# Altium PCB CH32V205V-R0.PcbDoc (part 1 of 2)
Units mil, origin at the board's own origin, x right, y up, seen from the top; angles counter-clockwise.
Board outline 3895.03 x 3750.03 mil, 2 copper layers (Top Layer, Bottom Layer); 66 components, 111 nets, 402 pads, 717 vias.
Unrouted connection lines stored in the file: 82.
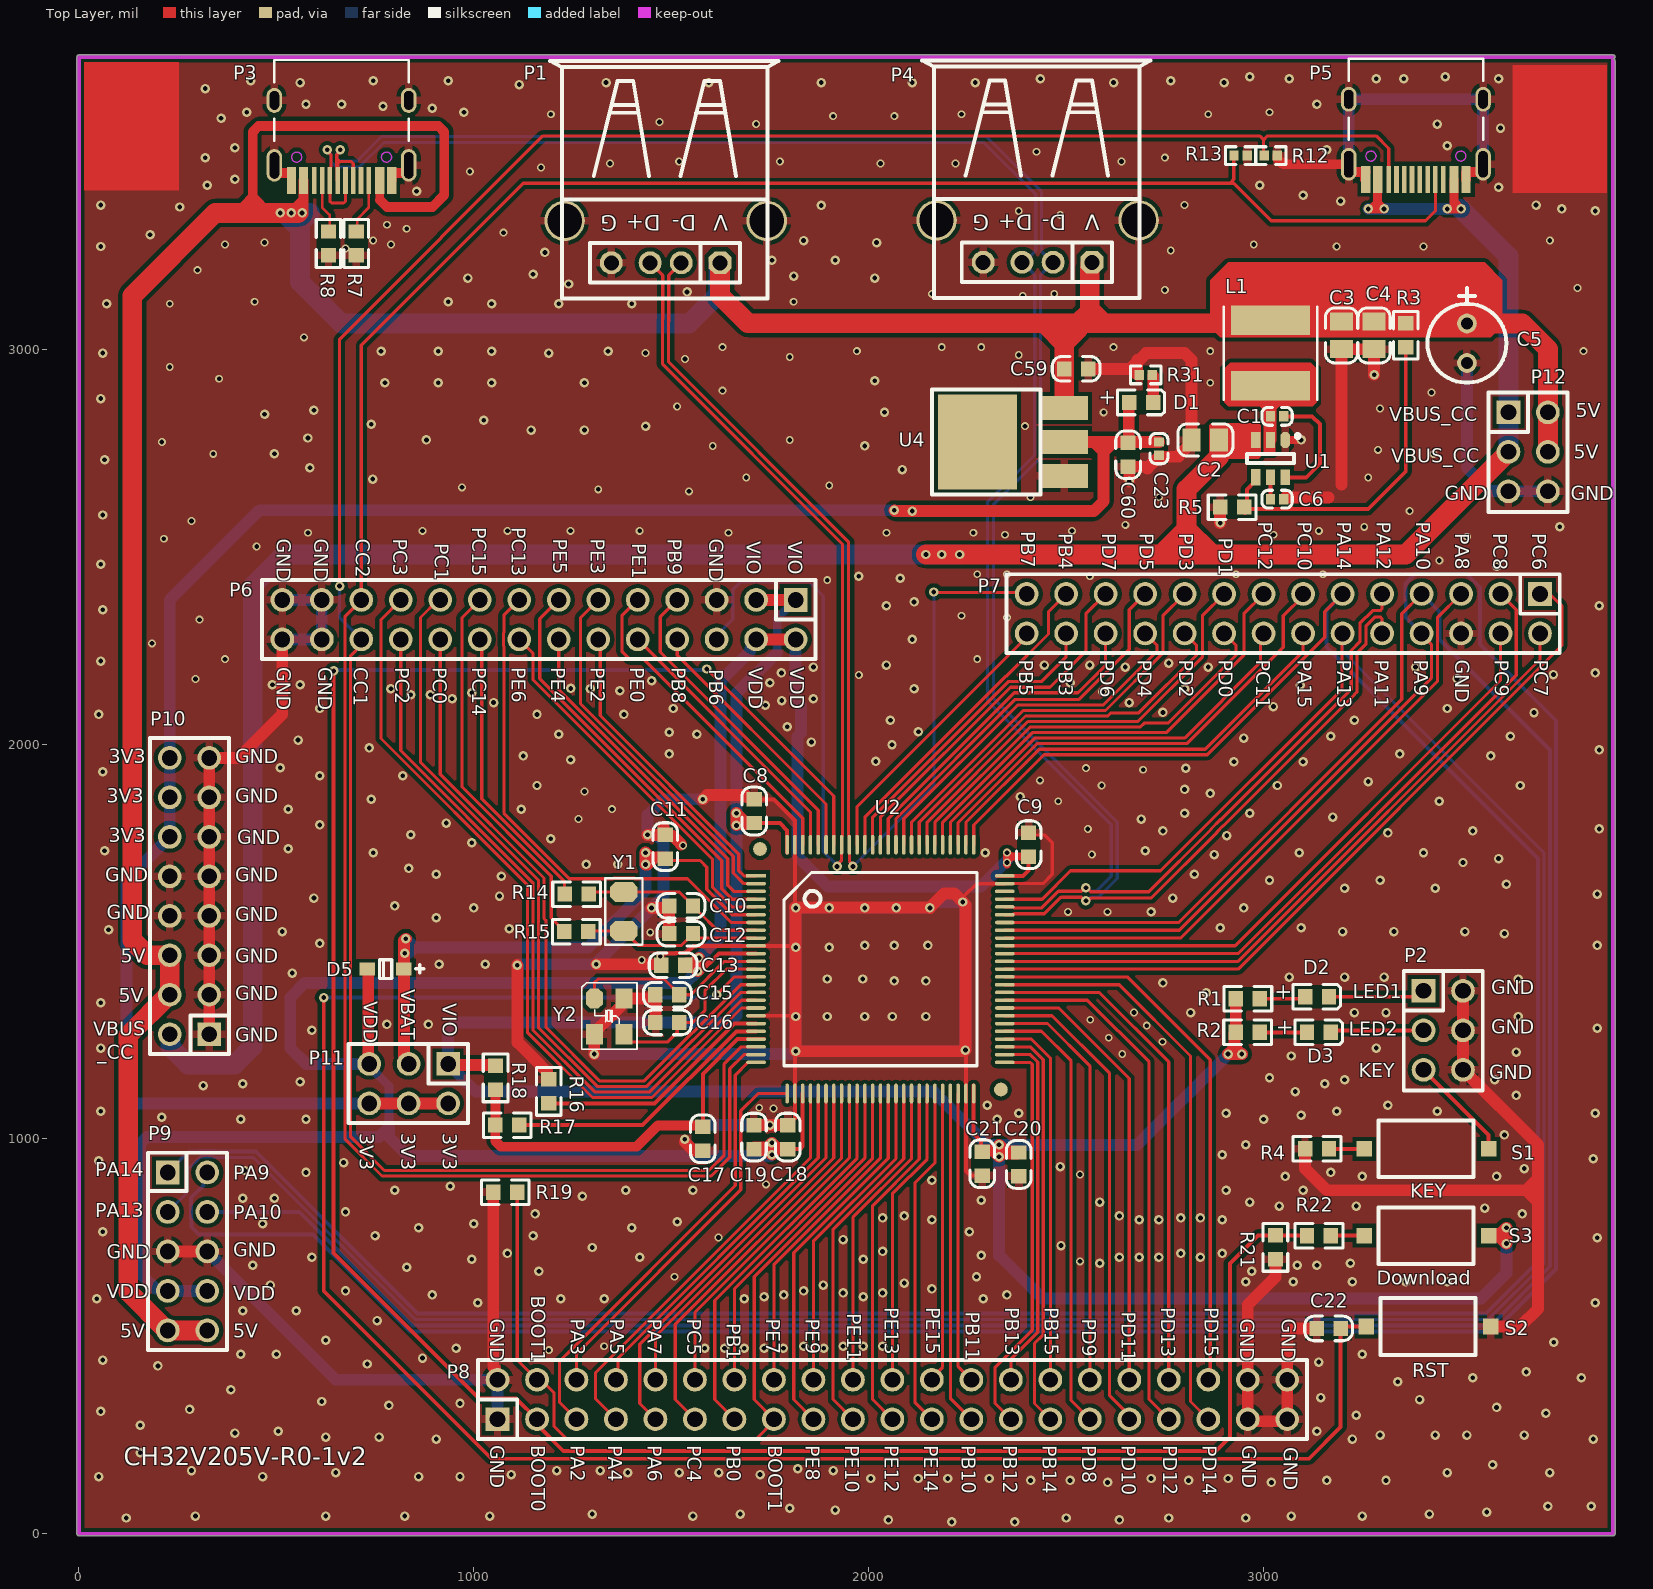
[diagram p0: Top Layer view]
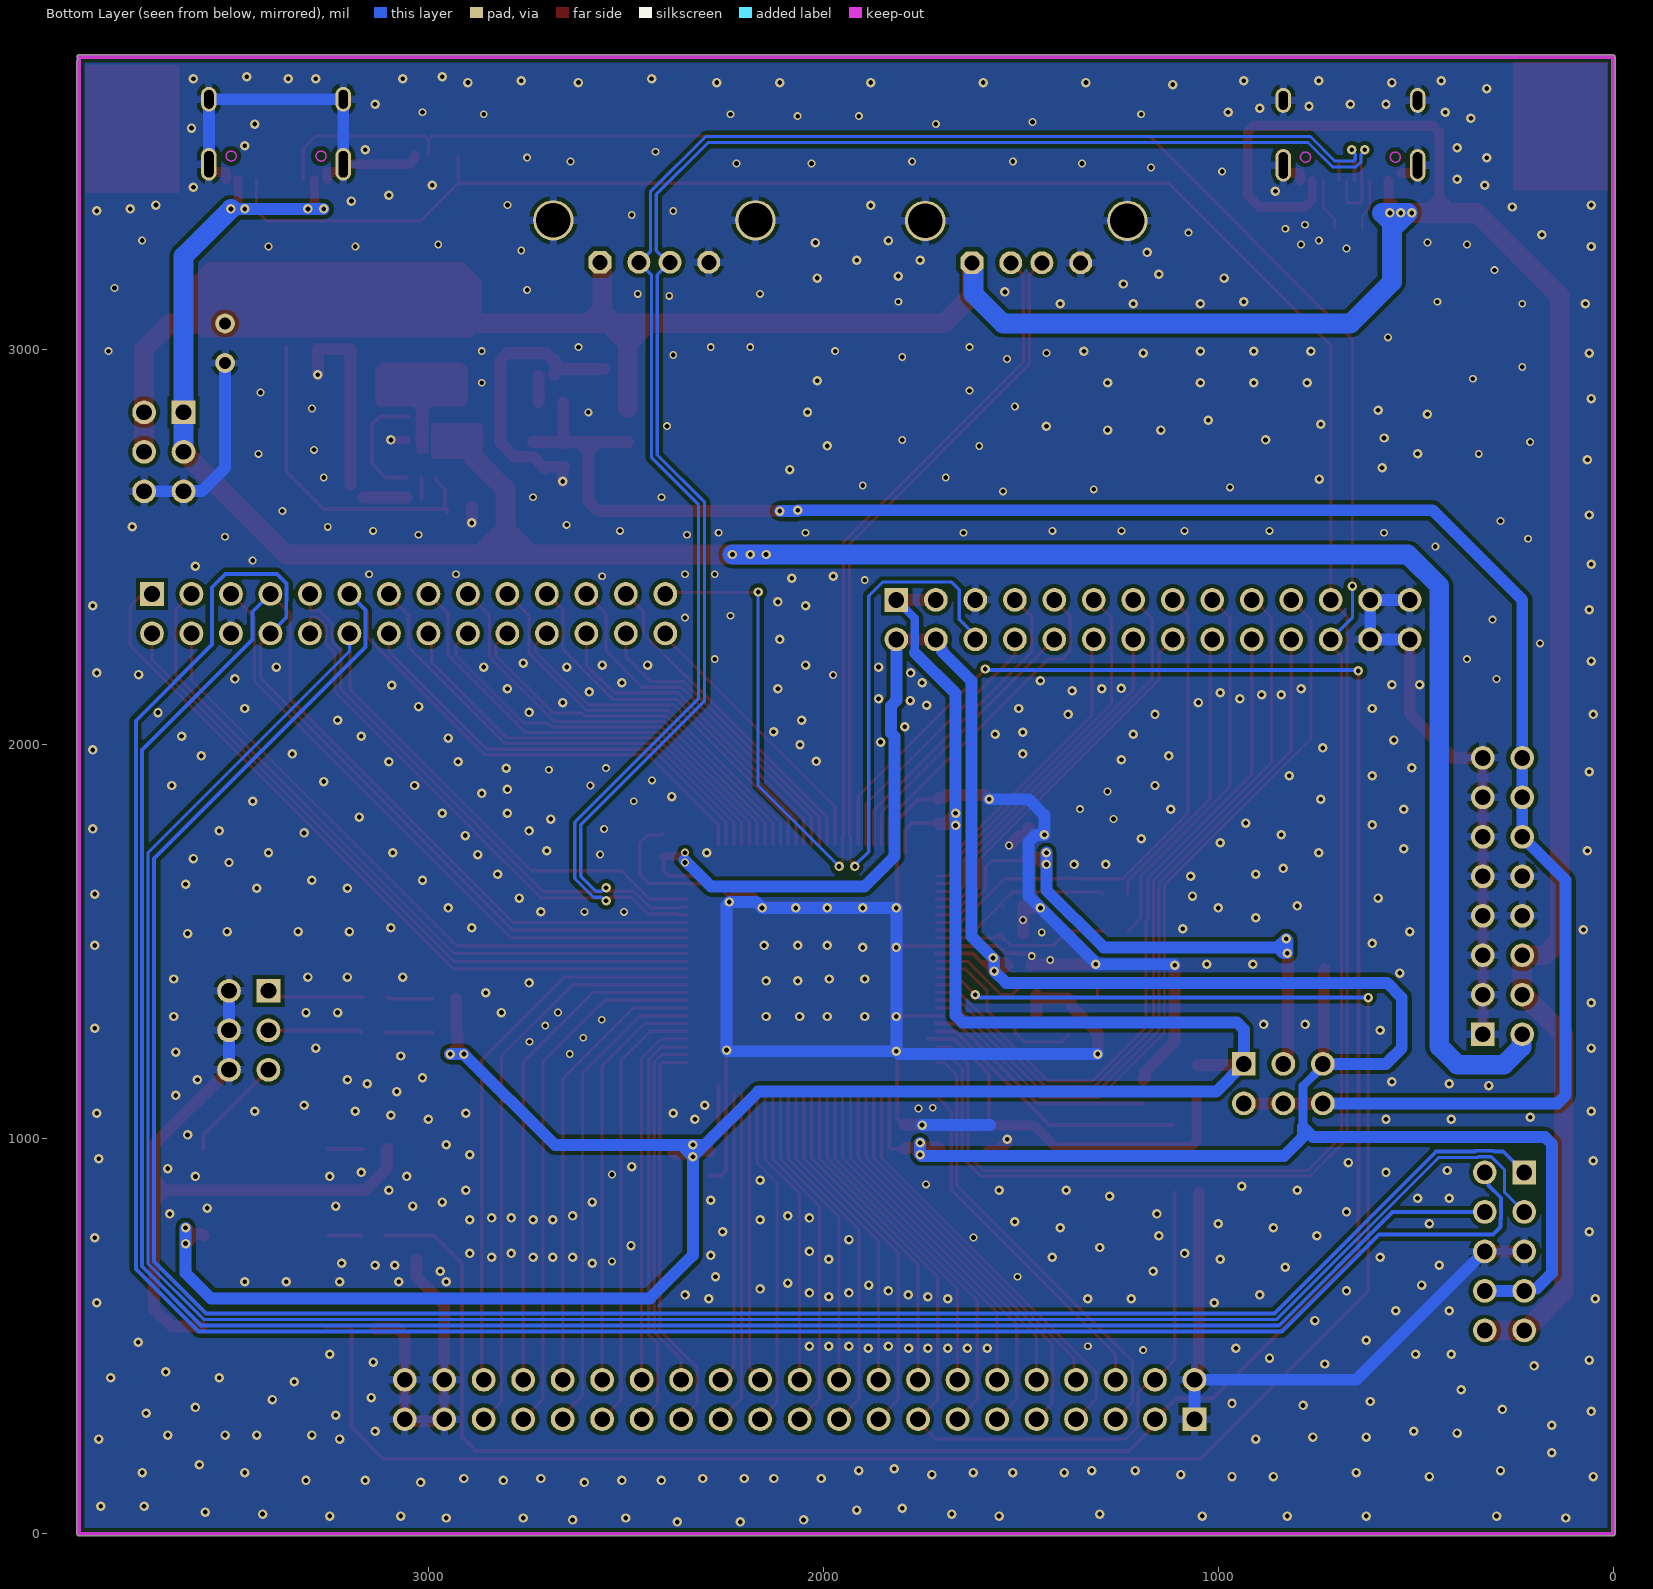
[diagram p1: Bottom Layer view, seen from below]

## Layer stack, top to bottom
Top Solder: solder mask 0.4, Solder Resist, Dk 3.5
Top Layer: signal copper 1.4
Dielectric 1: dielectric 12.6, FR-4, Dk 4.8
Bottom Layer: signal copper 1.4
Bottom Solder: solder mask 0.4, Solder Resist, Dk 3.5

## Board outline
-5.02,0 ccw(c0,0) 0,-5.02 3885,-5.02 ccw(c3885,0) 3890.02,0 3890.02,3730 ccw(c3885,3730) 3885.39,3735 ccw(c3885,3740) 3890.02,3740 ccw(c3885,3740) 3885,3745.02 0,3745.02 ccw(c0,3740) -5.02,3740

## Design rules (kind name [scope] priority, off if disabled: settings)
Clearance Clearance_1 [InPolygon] p1: gap=10 ignorepadtopadclearanceinfootprint=FALSE
Clearance [All] p2: gap=6 ignorepadtopadclearanceinfootprint=FALSE except(8: Arc-Via Track-Via SMDPad-Via THPad-Via Via-Via Via-Fill Via-Poly Via-Region Via-Hole)
ComponentClearance [All] p1 off: gap=10 collisioncheckmode=3 verticalgap=10 showdistances=FALSE
DiffPairsRouting [All] p1: maxlimit=10 minlimit=7 mostfreqgap=8 toplayer_minwidth=6 toplayer_maxwidth=15 toplayer_prefwidth=8 bottomlayer_minwidth=6 bottomlayer_maxwidth=15 bottomlayer_prefwidth=8 maxuncoupledlength=500
MinimumSolderMaskSliver [All] p1 off: minsoldermaskwidth=10
PolygonConnect PolygonConnect_1 [IsVia] p1: connectstyle=Direct reliefconductorwidth=10 reliefentries=4 polygonreliefangle="90 Angle" airgapwidth=10
PolygonConnect [All] p2: connectstyle=Relief reliefconductorwidth=20 reliefentries=4 polygonreliefangle="90 Angle" airgapwidth=10
RoutingVias [All] p1: holewidth=16 width=28 viastyle="Through Hole" minholewidth=11.81 minwidth=19.68 maxholewidth=28 maxwidth=50
SilkToSilkClearance [All] p1 off: silktosilkclearance=10
SilkToSolderMaskClearance [IsPad] p1 off: minsilkscreentomaskgap=10 clearancetoexposedcopper=TRUE
SolderMaskExpansion [All] p1: expansion=2 istentingtop=FALSE
Width [All] p1: maxlimit=100 minlimit=5 preferedwidth=10
25 further rules are at their usual default settings.

## Classes and differential pairs
differential pair NewDifferentialPair1: +PB7 -PB6
differential pair A: +PA12 -PA11

## Components (designator, comment, footprint, x,y, rotation, side; value= is the part's Value field where it differs from the comment)
C1 "NC(100nF)" 0402_C 3017.5,2830 r90 top
C2 "NC(22uF)" 0805_C 2817.5,2770 r0 top
C3 "NC(22uF)" 0805_C 3197.5,2999.92 r90 top
C4 "NC(22uF)" 0805_C 3280,3000 r90 top
C5 "NC(220uF)" CD0.1 3515,3065 r270 top
C6 "NC(1uF)" 0402_C 3050.96,2620 r270 top
C8 "0.1uF" 0603_C 1710,1860.63 r270 top
C9 "0.1uF" 0603_C 2405,1715 r90 top
C10 "12pF" 0603_C 1494.37,1590 r0 top
C11 "0.1uF" 0603_C 1485,1770.63 r270 top
C12 "12pF" 0603_C 1494.37,1520 r0 top
C13 "0.1uF" 0603_C 1535,1440 r180 top
C15 "22pF" 0603_C 1460,1365 r0 top
C16 "22pF" 0603_C 1460,1295 r0 top
C17 "0.1uF" 0603_C 1580,1030.63 r270 top
C18 "0.1uF" 0603_C 1795,1035 r270 top
C19 "4.7uF" 0603_C 1709.52,974.37 r90 top
C20 "4.7uF" 0603_C 2380,965.63 r270 top
C21 "0.1uF" 0603_C 2287.71,967.71 r270 top
C22 "0.1uF" 0603_C 3134.37,520 r0 top
C23 "0.1uF" 0402_C 2735,2765 r0 top
C59 "10uF" 0603_C 2495,2950 r0 top
C60 "10uF" 0603_C 2656.83,2762.81 r270 top
D1 "RED" 0603+ 2660,2865 r0 top
D2 "BLUE" 0603+ 3105,1360 r0 top
D3 "RED" 0603+ 3110,1270 r0 top
D5 "B0520WS" SOD-323 822.91,1430 r180 top
L1 "NC(15uH)" SMD_6x6mm 3017.5,2990 r90 top
P1 "USBHS" USBAF 1623.7,3218.7 r180 top locked
P2 "IO" IDC6-2.54mm 3405,1375 r270 top
P3 "USBFS" TYPE-C-Receptacle-2.0 665.08,3427.24 r180 top locked
P4 "USBFS" USBAF 2565.59,3220 r180 top locked
P5 "USBPD" TYPE-C-Receptacle-2.0 3385.79,3430 r180 top locked
P6 "" IDC28-2.54MM 1815,2365 r270 top
P7 "" IDC28-2.54MM 3700,2380 r270 top
P8 "HEADER 21x2" IDC42-2.54MM 1060,290 r90 top locked
P9 "LINK" IDC10-2.54mm 225,515 r0 top
P10 "HEADER 8x2" IDC16-2.54mm 330,1265 r180 top
P11 "HEADER 3x2" IDC6-2.54mm 935,1190 r180 top
P12 "HEADER 3x2" IDC6-2.54mm 3620,2840 r270 top
R1 "1K" 0603 2930,1355 r0 top
R2 "1K" 0603 2929.37,1270 r0 top
R3 "NC(100k)" 0603 3360,3005 r90 top
R4 "10K" 0603 3105,975 r0 top
R5 "NC(20k)" 0603 2890,2600 r0 top
R7 "NC(5.1K)" 0603 702,3298 r270 top
R8 "NC(5.1K)" 0603 632,3298 r270 top
R12 "NC(5.1K)" 0402 3001.54,3490 r0 top
R13 "NC(5.1K)" 0402 2925,3490 r0 top
R14 "NC(0R)" 0603 1230,1620 r0 top
R15 "NC(0R)" 0603 1229.37,1525 r0 top
R16 "0R" 0603 1190,1150.63 r270 top
R17 "0R" 0603 1054.37,1035 r0 top
R18 "0R" 0603 1055,1185 r270 top
R19 "10K" 0603 1110,865 r180 top
R21 "10K" 0603 3030,755.63 r270 top
R22 "1K" 0603 3110,755 r0 top
R31 "1K" 0402 2685,2935 r0 top
S1 "KEY" SMD_6.1x3.65x2.5mm-KEY 3569.96,975 r180 top
S2 "RST#" SMD_6.1x3.65x2.5mm-KEY 3574.96,525 r180 top
S3 "Download" SMD_6.1x3.65x2.5mm-KEY 3569.96,755 r180 top
U1 "NC(DC-DC:20V to 5V)" SOT-23-6 3054.9,2770 r180 top
U2 "CH32V205V" LQFP100 1714.72,1666.18 r270 top locked
U4 "1117-3.3V" SOT-223 2495,2679 r90 top
Y1 "32768Hz" FC-135 1380,1625 r270 top
Y2 "8MHz" XT3225 1305.2,1355.55 r270 top

## Footprints (in the part's own frame and the unit in brackets; to place one, negate y for a bottom-side part, rotate by r counter-clockwise, add the part's x,y. Pads: shape width x height; smd on the part's side, far side on the other; paste and mask are expansions set on the pad)
0402 [mm]
  rect 0.6x0.65 smd mask+0.051: 1(0,0) 2(0.85,0)
  silkscreen extent -0.55,-0.58 1.4,0.57
0402_C [mm]
  rect 0.65x0.6 smd mask+0.051: 1(0,0) 2(0,-0.85)
  silkscreen extent -0.58,-1.4 0.57,0.55
0603 [mm]
  rect 0.93x0.98 smd: 1(0,0) 2(1.54,0)
  silkscreen extent -0.76,-0.79 2.3,0.79
0603+ [mm]
  rect 0.93x0.98 smd: 1(0,0) 2(1.54,0)
  silkscreen extent -0.76,-0.79 2.27,0.79
0603_C [mm]
  rect 0.93x0.98 smd mask+0.051: 1(0,0) 2(1.54,0)
  silkscreen extent -0.76,-0.79 2.31,0.79
0805_C [mm]
  rect 1.16x1.47 smd mask+0.051: 1(0,0) 2(1.78,0)
  silkscreen extent -0.88,-1.04 2.66,1.03
CD0.1 [mil]
  round 50 hole 30: 1(0,0) 2(100,0)
  silkscreen extent -90,-100 150,100
FC-135 [mil]
  oct 50x70 smd: 1(0,0) 2(98.43,0)
  silkscreen extent -35,-47 133,47
IDC6-2.54mm [mil]
  rect 60x60 hole 40: 1(0,0)
  round 60 hole 40: 2(0,100) 3(100,0) 4(100,100) 5(200,0) 6(200,100)
  silkscreen extent -50,-50 252,150
IDC10-2.54mm [mil]
  rect 60x60 hole 40: 1(0,400)
  round 60 hole 40: 2(100,400) 3(0,300) 4(100,300) 5(0,200) 6(100,200) 7(0,100) 8(100,100) 9(0,0) 10(100,0)
  silkscreen extent -50,-50 150,450
IDC16-2.54mm [mil]
  rect 60x60 hole 40: 1(0,0)
  round 60 hole 40: 2(100,0) 3(0,-100) 4(100,-100) 5(0,-200) 6(100,-200) 7(0,-300) 8(100,-300) 9(0,-400) 10(100,-400) 11(0,-500) 12(100,-500) 13(0,-600) 14(100,-600) 15(0,-700) 16(100,-700)
  silkscreen extent -50,-750 150,50
IDC28-2.54MM [mil]
  rect 60x60 hole 40: 1(0,0)
  round 60 hole 40: 2(100,0) 3(0,-100) 4(100,-100) 5(0,-200) 6(100,-200) 7(0,-300) 8(100,-300) 9(0,-400) 10(100,-400) 11(0,-500) 12(100,-500) 13(0,-600) 14(100,-600) 15(0,-700) 16(100,-700) 17(0,-800) 18(100,-800) 19(0,-900) 20(100,-900) 21(0,-1000) 22(100,-1000) 23(0,-1100) 24(100,-1100) 25(0,-1200) 26(100,-1200) 27(0,-1300) 28(100,-1300)
  silkscreen extent -50,-1351 150,50
IDC42-2.54MM [mil]
  rect 60x60 hole 40: 1(0,0)
  round 60 hole 40: 2(100,0) 3(0,-100) 4(100,-100) 5(0,-200) 6(100,-200) 7(0,-300) 8(100,-300) 9(0,-400) 10(100,-400) 11(0,-500) 12(100,-500) 13(0,-600) 14(100,-600) 15(0,-700) 16(100,-700) 17(0,-800) 18(100,-800) 19(0,-900) 20(100,-900) 21(0,-1000) 22(100,-1000) 23(0,-1100) 24(100,-1100) 25(0,-1200) 26(100,-1200) 27(0,-1300) 28(100,-1300) 29(0,-1400) 30(100,-1400) 31(0,-1500) 32(100,-1500) 33(0,-1600) 34(100,-1600) 35(0,-1700) 36(100,-1700) 37(0,-1800) 38(100,-1800) 39(0,-1900) 40(100,-1900) 41(0,-2000) 42(100,-2000)
  silkscreen extent -50,-2050 150,50
LQFP100 [mil]
  round 35 smd: 0(-68,10) 0(541.18,620)
  rect 9x50 smd mask+2: 1(0,0)
  oval 9x50 smd mask+2: 2(19.68,0) 3(39.37,0) 4(59.05,0) 5(78.74,0) 6(98.42,0) 7(118.11,0) 8(137.79,0) 9(157.48,0) 10(177.16,0) 11(196.85,0) 12(216.53,0) 13(236.22,0) 14(255.9,0) 15(275.59,0) 16(295.27,0) 17(314.96,0) 18(334.64,0) 19(354.33,0) 20(374.01,0) 21(393.7,0) 22(413.38,0) 23(433.07,0) 24(452.75,0) 25(472.44,0) 51(472.44,629.92) 52(452.75,629.92) 53(433.07,629.92) 54(413.38,629.92) 55(393.7,629.92) 56(374.01,629.92) 57(354.33,629.92) 58(334.64,629.92) 59(314.96,629.92) 60(295.27,629.92) 61(275.59,629.92) 62(255.9,629.92) 63(236.22,629.92) 64(216.53,629.92) 65(196.85,629.92) 66(177.16,629.92) 67(157.48,629.92) 68(137.79,629.92) 69(118.11,629.92) 70(98.42,629.92) 71(78.74,629.92) 72(59.05,629.92) 73(39.37,629.92) 74(19.68,629.92) 75(0,629.92)
  oval 50x9 smd mask+2: 26(551.18,78.74) 27(551.18,98.43) 28(551.18,118.11) 29(551.18,137.8) 30(551.18,157.48) 31(551.18,177.17) 32(551.18,196.85) 33(551.18,216.54) 34(551.18,236.22) 35(551.18,255.91) 36(551.18,275.59) 37(551.18,295.28) 38(551.18,314.96) 39(551.18,334.65) 40(551.18,354.33) 41(551.18,374.02) 42(551.18,393.7) 43(551.18,413.39) 44(551.18,433.07) 45(551.18,452.76) 46(551.18,472.44) 47(551.18,492.13) 48(551.18,511.81) 49(551.18,531.5) 50(551.18,551.18) 76(-78.74,551.18) 77(-78.74,531.5) 78(-78.74,511.81) 79(-78.74,492.13) 80(-78.74,472.44) 81(-78.74,452.76) 82(-78.74,433.07) 83(-78.74,413.39) 84(-78.74,393.7) 85(-78.74,374.02) 86(-78.74,354.33) 87(-78.74,334.65) 88(-78.74,314.96) 89(-78.74,295.28) 90(-78.74,275.59) 91(-78.74,255.91) 92(-78.74,236.22) 93(-78.74,216.54) 94(-78.74,196.85) 95(-78.74,177.17) 96(-78.74,157.48) 97(-78.74,137.8) 98(-78.74,118.11) 99(-78.74,98.43) 100(-78.74,78.74)
  silkscreen extent -8,70 481,560
SMD_6.1x3.65x2.5mm-KEY [mm]
  rect 1x1 smd: 1(0,0) 2(8,0)
  silkscreen extent 0.98,-1.83 7.08,1.83
SMD_6x6mm [mm]
  rect 1.9x5.1 smd: 1(-2.1,0) 2(2.1,0)
  silkscreen extent -3,-3 3,3
SOD-323 [mm]
  rect 1x0.83 smd: 1(0,0) 2(2.36,0)
  silkscreen extent -1.28,-0.6 1.58,0.6
SOT-23-6 [mm] "SOT-23-6"
  oct 0.6x1 smd: 1(0,0)
  rect 0.6x1 smd: 2(0.95,0) 3(1.9,0) 5(0.95,2.4) 6(0,2.4)
  rect 0.6x1.04 smd: 4(1.9,2.4)
  silkscreen extent -0.93,-0.38 2.45,1.49
SOT-223 [mil]
  rect 60x120 smd: 1(0,0) 2(86,0) 3(172,0)
  rect 240x200 smd: ""(86,220)
  silkscreen extent -47,60 219,335
TYPE-C-Receptacle-2.0 [mm]
  oval 1x2.1 hole 0.6 slot 1.7 at 90 deg: 0(-4.32,-0.97) 0(4.32,-0.97)
  oval 1x1.6 hole 0.6 slot 1.2 at 90 deg: 0(-4.32,-5.15) 0(4.32,-5.15)
  rect 0.6x1.75 smd mask+0.051: A1(-3.225,0) A4(-2.45,0) B1(3.225,0) B4(2.45,0)
  rect 0.3x1.75 smd mask+0.051: A5(-1.25,0) A6(-0.25,0) A7(0.25,0) A8(1.25,0) B5(1.75,0) B6(0.75,0) B7(-0.75,0) B8(-1.75,0)
  Keep-Out Layer circle w0.1: c2.89,-1.5 r0.325
  Keep-Out Layer circle w0.1: c-2.89,-1.5 r0.325
  silkscreen extent -4.32,-7.75 4.32,-2.55
USBAF [mm]
  round 2.6 hole 2.2: 0(-3,-2.7) 0(10,-2.7)
  oct 1.473x1.473 hole 0.965: 1(0,0)
  round 1.473 hole 0.965: 2(2.5,0) 3(4.5,0) 4(7,0)
  silkscreen extent -3.75,-12.99 10.95,2.29
XT3225 [mm]
  oct 1.3x1.1 smd: 1(0,0)
  rect 1.3x1.1 smd: 2(2.3,0) 3(2.3,1.9) 4(0,1.9)
  silkscreen extent -1.02,-0.8 3.27,2.74

## Part data
C1 C2 C3 C4 C6: library part "0603 100nF (104) 10% 50V", "贴片电容", Package=0603, SuppliersPartNumber=C14663, ComponentLink1Description=供应商链接, ComponentLink1URL=http://www.szlcsc.com/product/details_15331.html, Supplier=LC
C5 C8 C9 C10 C11 C12 C13 C15 C16 C17 C18 C19 C20 C21 C22 C23 C59 C60: library part CAP, "Capacitor"
D1 D2 D3: library part LED0, "Typical INFRARED GaAs LED", LatestRevisionDate=08-Jul-2005, LatestRevisionNote="Mech Layer 1 removed.", PackageDescription="LED; 2 Leads", PackageReference=LED-0, Published=8-Jun-2000, Publisher="Altium Limited"
D5: library part DIODE, "Diode"
L1: library part INDUCTOR
P1 P4: library part USB, "USB Port"
P2: library part "HEADER 3x2", "Header, 3-Pin, Dual row"
P3 P5: library part TYPE-C1
P6 P7: library part "HEADER 14x2", "Header, 14-Pin, Dual row"
P8: "Header, 21-Pin, Dual row"
P9: library part "HEADER 5x2", "Header, 5-Pin, Dual row"
P10: "Header, 8-Pin, Dual row"
P11 P12: "Header, 3-Pin, Dual row"
R1 R2 R3 R4 R5 R14 R15 R31: library part RES
R7 R8 R12 R13 R19 R21 R22: library part Res2, "Resistor"
  R19 R21 R22: LatestRevisionDate=17-Jul-2002, LatestRevisionNote="Re-released for DXP Platform.", PackageReference=AXIAL-0.4, Published=8-Jun-2000, Publisher="Altium Limited"
R16 R17 R18: library part R
S1 S2 S3: library part KEY1
U1: library part TPS54202, "DCDC"
U2: "RISC-V MCU, 192MHz, USB_480M, USB FS, PD, PIOC, ADC, TKEY, 2*OPA, 2*CMP"
Y1 Y2: library part XTAL, "Crystal Oscillator", LatestRevisionDate=17-Jul-2002, LatestRevisionNote="Re-released for DXP Platform.", PackageDescription="Crystal, Thru-Hole; 2 Leads; Body 3.1 x 8.2 mm (Dia.xH)", PackageReference=R38, Published=8-Jun-2000, Publisher="Altium Limited"

## Via types
v1: diameter 24, hole 12, Top Layer to Bottom Layer, tented both sides, 571 vias
v2: diameter 20, hole 12, Top Layer to Bottom Layer, tented both sides, 134 vias
v3: diameter 19.68, hole 11.81, Top Layer to Bottom Layer, tented both sides, 12 vias

## Nets (pads, with @x,y where several pads share a name; then routed paths per layer and width w, separated by ;. In a path a pad name is that pad's centre, name@x,y a point inside that pad or via, vN(x,y) a via of type N, cw(c..) or ccw(c..) an arc to the next point about the centre after c; other vN are vias at no path point)
3V3: C23.1 C60.1 D1.1 P10.12 P10.14 P10.16 P11.2 P11.4 P11.6 U4.2 | length 5205.9
  Top Layer w30: P11.6@735,1090 P11.4@835,1090 P11.2@935,1090 ; v1(2065,2592) 2067,2590 v1(2110,2590) 2570,2590 2595,2615 2595,2740 ; U4.2@2495,2765 2570,2765 ; C60.1@2659.02,2760.63 C60.1@2656.83,2762.81 ; D1.1@2660,2865 2658.42,2863.41 C60.1@2658.42,2764.4 ; C23.1@2735,2765 2659.02,2765 C60.1@2658.42,2764.4 ; 2570,2765 2595,2765 ; 2570,2765 2595,2740 ; 2595,2740 2620,2765 ; 2595,2740 2595,2765 ; 2595,2765 2620,2765 ; 2620,2765 2654.65,2765 C60.1@2656.83,2762.81 ; C60.1@2656.83,2762.81 C60.1@2658.42,2764.4
  Bottom Layer w30: P11.6@735,1090 140,1090 120,1110 120,1655 P10.12@230,1765 P10.14@230,1865 P10.16@230,1965 230,2365 457,2592 v1(2065,2592) ; v1@2065,2590 v1(2110,2590)
5V: C3.2 C4.2 C5.1 C59.1 L1.2 P1.1 P3.A4 P3.B4 P4.1 P9.9 P9.10 P10.4 P10.6 P12.2 P12.4 R3.2 U4.3 | length 9301.3
  Top Layer w22: P3.A4@761.54,3427.24 761.54,3378.46 762.22,3377.78
  Top Layer w25: 400,3345 400.21,3345 ; 417.6,3362.4 440,3384.79 ; 435,3345 440,3350 440,3384.79 ; 480,3345 479.79,3345 440,3384.79 ; 525,3345 v1@535,3345 ; 551.81,3361.81 565,3375 568.62,3375 ; v1@568.62,3341.67 568.62,3375 ; P3.B4@568.62,3427.24 568.62,3375 ; 762.22,3377.78 780,3360 895,3360 925,3390 925,3550.35 910.36,3565 454.64,3565 440,3550.35 440,3384.79
  Top Layer w50: P9.10@325,515 P9.9@225,515 222.29,515 125,612.29 125,1262.71 230,1367.71 P10.6@230,1465 173,1465 135,1503 135,3135 345,3345 400,3345 ; 400.21,3345 435,3345 479.79,3345 ; 480,3345 525,3345 ; v1@530,3345 v1@555,3345 ; P1.1@1623.7,3218.7 1623.7,3136.3 1694.47,3065.53 2450,3065.53 ; U4.3@2495,2851 C59.1@2495,2950 2495,3015 ; P4.1@2565.59,3220 2561.59,3216 2561.59,3207.86 2560,3206.26 2560,3094.82 ; P12.4@3720,2740 P12.2@3720,2840 3720,3000 3655,3065 C5.1@3515,3065 3507.32,3072.68 L1.2@3017.5,3072.68 3010.36,3065.53 2595,3065.53 ; 2450,3065.53 2505,3065.53 ; 2450,3065.53 2450,3060 2495,3015 ; 2495,3015 2530.71,3050.71 2530.71,3065.53 ; 2495,3015 2495,3055.53 2505,3065.53 ; 2505,3065.53 2530.71,3065.53 ; 2530.71,3065.53 2595,3065.53 ; 2530.71,3065.53 2560,3094.82 ; 2560,3094.82 2565.71,3094.82 2595,3065.53
  Bottom Layer w50: 555,3310 520,3345 585,3345 555,3315 ; v1@560,3345 560,3170 665,3065 1545,3065 1619.7,3139.7 1619.7,3214.7 P1.1@1623.7,3218.7
  other v1: 510,3345 537.5,3345 565,3345
BOOT0: P8.3 R21.1 R22.1 U2.94 | length 6163.8
  Top Layer w8: v1(1590,2190) 1911.57,1868.43 U2.94@1911.57,1744.92
  Top Layer w10: v1(645,2185) 645,711 1013,343 1107,343 P8.3@1160,290 1160,276.47 1226.47,210 2880,210 2915,245 2915,685 2985.63,755.63 R21.1@3030,755.63 3109.37,755.63 R22.1@3110,755
  Bottom Layer w10: v1(645,2185) 647.5,2187.5 1587.5,2187.5 v1(1590,2190)
BOOT1: P8.4 P8.15 R19.1 U2.37 | length 2201.2
  Top Layer w8: R19.1@1110,865 1110,440 P8.4@1160,390 1170,390 1203,357 1203,272 1235,240 1715,240 1760,285 P8.15@1760,290 1710,340 1710,651.2 2010,951.2 U2.37@2010,1115
CC1: P5.B5 P6.24 R12.1 U2.23 | length 6391.1
  Top Layer w8: v1(660,2400) 660,3025 1175,3540 2990,3540 3000,3530 ; P6.24@715,2265 715,2250.93 688,2223.93 688,1005.38 773.39,920 1595,920 1633.94,958.94 1633.94,1189.94 1677.11,1233.11 U2.23@1714.72,1233.11 ; R12.1@3001.54,3490 3000,3491.54 3000,3530 ; P5.B5@3316.89,3430 3316.89,3508.11 3285,3540 3010,3540 3000,3530
  Bottom Layer w8: v1(660,2400) 660,2320 P6.24@715,2265
CC2: P5.A5 P6.23 R13.1 U2.24 | length 6459.2
  Top Layer w8: U2.24@1714.72,1213.43 1684.12,1213.43 1647.94,1177.24 1647.94,953.14 1600.8,906 767.59,906 674,999.59 674,2324 P6.23@715,2365 715,3010 1125,3420 2915,3420 ; R13.1@2925,3490 2924.32,3489.32 2924.32,3430 2915,3420.68 2915,3420 ; P5.A5@3435,3430 3435,3350 3410,3325 3019.32,3325 2924.32,3420 2915,3420
GND: C2.1 C3.1 C4.1 C5.2 C6.1 C8.1 C9.2 C10.1 C11.1 C12.1 C13.2 C15.1 C16.1 C17.2 C18.1 C19.2 C20.2 C21.2 C22.1 C23.2 C59.2 C60.2 P1.0 P1.4 P2.2 P2.4 P2.6 P3.0 P3.A1 P3.B1 P4.0 P4.4 P5.0 P5.A1 P5.B1 P6.5 P6.25 P6.26 P6.27 P6.28 P7.6 P8.1 P8.2 P8.39 P8.40 P8.41 P8.42 P9.5 P9.6 P10.1 P10.3 P10.5 P10.7 P10.8 P10.9 P10.10 P10.11 P10.13 P10.15 P12.5 P12.6 R4.1 R5.1 R7.2 R8.2 R12.2 R13.2 R16.1 R19.2 R21.2 R31.1 S2.1 U1.1 U2.10 U2.19 U2.27 U2.49 U2.74 U2.99 U4.1 Y2.2 Y2.4 | length 16808.7
  Top Layer w8: v1(2238,1600) 2241.06,1603.06 2241.06,1614.06 2273.3,1646.3 2344.45,1646.3 U2.74@2344.65,1646.5 2441.5,1646.5 2465,1670 2465,1750 2445,1770 2410.63,1770 C9.2@2405,1775.63
  Top Layer w10: 1464.37,1469.29 1511.14,1469.29 1512.14,1470.29 1537.66,1470.29 1556.38,1489.02 U2.10@1714.72,1489.02 1807.2,1489.02 1811.21,1485 v1(1815,1485) ; U2.19@1695,1311.85 1813.15,1311.85 v1(1815,1310) ; C8.1@1720,1860 1759.92,1860 1813.15,1806.77 U2.99@1813.15,1744.92 1813.65,1744.42 1813.65,1586.35 v1(1815,1585) ; C18.1@1795,1035 1795.98,1035 1813.15,1052.17 1813.15,1115 1813.65,1115.5 1813.65,1209.86 1815,1211.21 v1(1815,1222) ; v1(2245,1225) 2246.22,1223.78 U2.49@2246.22,1115 2246.22,918.78 2257.92,907.08 C21.2@2287.71,907.08
  Top Layer w20: U1.1@3054.9,2770 v1(3095,2770)
  Top Layer w25: P3.0@495,3465.43 495,3452.98 501.64,3446.34 P3.B1@537.42,3446.34 ; P3.A1@792.05,3427.24 792.05,3445.65 792.74,3446.34 828.52,3446.34 835.16,3452.98 P3.0@835.16,3465.43 ; R12.2@3035,3490 3035,3482.83 3049.64,3468.19 P5.0@3215.71,3468.19 3215.71,3455.73 3222.35,3449.09 3258.13,3449.09 P5.B1@3258.82,3448.41 ; P5.B1@3256.82,3430 P5.B1@3256.82,3448.41 ; P5.A1@3512.76,3430 3512.76,3448.41 3513.44,3449.09 3549.23,3449.09 3555.87,3455.73 P5.0@3555.87,3468.19
  Top Layer w30: P9.5@225,715 P9.6@325,715 ; P10.1@330,1265 P10.3@330,1365 P10.5@330,1465 P10.7@330,1565 P10.9@330,1665 P10.11@330,1765 P10.13@330,1865 P10.15@330,1965 405,1965 515,2075 P6.28@515,2265 ; R19.2@1049.37,865 1049.37,421.84 1054.26,416.95 1054.26,395.74 P8.2@1060,390 ; v1(1110,1440) 1110.63,1439.37 1110.63,1244.37 1150,1205 1185.71,1169.29 1185.71,1153.94 1189.02,1150.63 R16.1@1190,1150.63 ; P1.0@1216.15,3311.15 P1.0@1230,3325 ; v1(1305,1215) 1305,1264.8 Y2.2@1305.2,1265 1305.2,1268.94 1373.35,1337.09 1373.35,1348.9 Y2.4@1380,1355.55 1451.54,1355.55 C15.1@1460,1364.02 ; v1(1310,1442.5) 1471.87,1442.5 C13.2@1474.37,1440 ; v1(1440,1770) 1484.37,1770 C11.1@1485,1770.63 ; v1(1450,1585) 1489.37,1585 1490.08,1585.71 1491.06,1585.71 C10.1@1494.37,1589.02 ; C16.1@1460,1295 C15.1@1460,1364.02 ; C15.1@1460,1365 C15.1@1460,1364.02 ; 1480.71,1789.29 1480.71,1773.94 1484.02,1770.63 C11.1@1485,1770.63 ; C12.1@1494.37,1520 C10.1@1494.37,1589.02 ; C10.1@1494.37,1590 C10.1@1494.37,1589.02 ; v2@1525,1746 1503.68,1767.32 1488.31,1767.32 C11.1@1485,1770.63 ; v1@1535,992 1557,970 C17.2@1580,970 ; v1(1580,1860) 1590.63,1870.63 1688.14,1870.63 1694.83,1863.94 1706.69,1863.94 C8.1@1710,1860.63 ; C19.2@1708.53,1038.57 1705.23,1035.26 1705.36,1035.13 C18.1@1794.87,1035.13 ; C18.1@1791.69,1038.31 C18.1@1794.87,1035.13 ; C18.1@1795,1035 C18.1@1794.87,1035.13 ; v1@1813.65,1586.35 v1@2155,1586.35 ; v1(1815,1585) v1(1815,1485) v1(1815,1310) v1(1815,1222) 2242,1222 v1(2245,1225) 2245,1593 v1(2238,1600) 2216.43,1621.57 2191.57,1621.57 v1(2155,1585) ; C59.2@2555.63,2950 2662.57,2950 ; v1(2660,2665) 2660,2699.02 C60.2@2656.83,2702.18 2705.65,2702.18 ; 2667,2950 R31.1@2682,2935 ; 2670,2950 2662.57,2950 ; R31.1@2680,2935 2680,2972.43 ; P4.0@2683.7,3326.3 P4.0@2695,3315 ; 2705.65,2698.18 C23.2@2733.46,2726 ; C23.2@2745.25,2727.54 2785.14,2727.54 ; 2785.14,2731.54 C2.1@2817.5,2763.9 ; C2.1@2817.5,2770 2817.5,2972.43 2799.93,2990 2702.57,2990 2662.57,2950 ; v1(2890,2560) R5.1@2890,2600 ; P8.39@2945,285 3055,285 P8.41@3060,290 P8.42@3060,390 3060,502.43 3077.57,520 C22.1@3134.37,520 ; P8.39@2960,290 P8.40@2960,390 2960,580 3030,650 R21.2@3030,695 ; C6.1@3054.96,2624 3164,2624 ; R4.1@3105,975 3105,925 3160,870 3665,870 ; 3197.5,2657.5 C3.1@3197.5,2999.92 3197.54,2999.96 C4.1@3280,3000 C4.1@3280,3000 v1(3280,2935) ; P2.2@3505,1375 P2.4@3505,1275 P2.6@3505,1175 3695,985 3695,900 ; S2.1@3574.96,525 3650,525 3695,570 3695,840 ; 3665,870 3695,840 ; 3665,870 3695,870 ; 3665,870 3695,900 ; 3695,840 3695,870 ; 3695,870 3695,900
  Bottom Layer w30: P10.1@315,1280 P10.1@330,1265 ; P9.6@325,715 650,390 P8.2@1060,390 P8.1@1060,290 ; P6.28@515,2265 P6.26@615,2265 P6.25@615,2365 P6.27@515,2365 ; P3.0@835.16,3630 P3.0@836.54,3631.38 ; v1(1110,1440) 1112.5,1442.5 v1(1310,1442.5) 1310,1445 v1(1450,1585) 1480,1615 1480,1752.43 1462.43,1770 v1(1440,1770) 1440,1820 1480,1860 v1(1580,1860) ; P1.0@1230.51,3324.49 P1.0@1230,3325 P1.0@1230.65,3325.65 ; v1(1305,1215) 1808,1215 v1(1815,1222) ; P1.4@1342.75,3224.06 P1.4@1348.11,3218.7 ; 1578,1035 v1(1750,1035) ; P4.0@2683.05,3325.65 P4.0@2683.7,3326.3 ; P5.0@3214.33,3631.38 P5.0@3215.71,3632.76 ; P5.0@3215.71,3468.19 P5.0@3215.71,3632.76 ; P2.6@3505,1175 P2.4@3505,1275 P2.2@3505,1375 ; C5.2@3515,2965 3515,2700 3574.47,2640.53 3619.47,2640.53 P12.5@3620,2640 P12.6@3720,2640 ; P5.0@3555.87,3468.19 P5.0@3555.87,3632.76 P5.0@3215.71,3632.76 ; v1(1815,1222) 2242,1222 v1(2245,1225) 2245,1593 v1(2238,1600) 2170,1600 v1(2155,1585) v1(1815,1585) v1(1815,1485) v1(1815,1310) v1(1815,1222)
  other v1: 2210,30 2370,30 2050,35 2635,35 120,40 2500,40 2760,40 2955,40 295,45 625,45 825,45 1040,45 1555,45 3070,45 3250,45 1300,50 1675,50 3420,50 3565,55 1915,60 1800,65 3720,70 3830,70 2605,130 3020,130 2410,135 2510,135 2810,135 3160,135 3310,135 2005,140 2125,140 2200,140 2305,140 2715,140 2910,140 50,145 465,145 860,145 965,145 1095,150 1725,150 650,155 1390,155 1520,155 1620,155 3465,155 3725,155 285,160 1210,160 1320,160 1910,160 1820,165 3580,175 155,205 905,240 3225,240 3835,240 625,245 760,245 3295,250 3435,250 3515,250 3660,250 395,255 505,260 3135,260 155,275 3235,300 3715,305 55,310 280,315 3590,320 785,325 965,330 615,335 3395,340 3145,345 385,365 3340,385 3530,395 3805,395 3665,410 200,425 730,430 3140,435 60,440 870,445 410,455 500,455 3250,455 955,470 1585,470 1635,470 1685,470 1735,470 1784,470 1886,470 1835,475 1935,475 1986,475 2035,475 3735,485 625,490 755,540 415,565 550,565 1010,585 3840,585 45,595 1220,595 1330,595 1685,595 2290,595 1735,600 1986,600 895,605 1785,605 2350,605 1935,610 2035,610 675,615 1835,615 2160,620 485,630 1885,630 2090,635 2955,638 3075,638 3225,638 3360,638 3465,638 2273,651 1165,665 2970,665 830,675 440,680 3085,680 3135,680 2585,685 3220,685 995,695 1986,695 590,700 1420,700 2635,700 2685,700 2735,700 2840,700 2285,705 1085,710 2790,710 2895,710 2035,715 1300,725 2487,730 1935,745 3845,750 750,755 1150,755 60,765 2255,765 860,775 1400,775 465,785 1000,785 1515,790 2160,795 2685,795 2735,795 2895,795 2035,800 2790,800 2840,800 2090,805 2635,805 1155,810 3655,810 675,815 3560,825 3040,830 3235,830 2585,840 2965,840 2285,845 415,850 495,850 1275,855 800,870 1385,870 1555,870 2905,870 3100,870 940,880 2160,895 3055,905 3250,905 3590,905 575,915 3170,915 420,920 3660,925 2485,930 670,940 50,945 3835,950 2895,960 2955,985 1534,999 3610,1010 410,1050 575,1050 2325,1050 3000,1050 210,1055 3095,1060 2380,1065 2905,1065 3840,1065 55,1070 3185,1070 3440,1070 2300,1085 3315,1085 3640,1110 3080,1120 315,1135 415,1140 3155,1140 560,1145 3205,1150 3585,1150 3015,1155 3070,1210 3640,1220 55,1230 3285,1230 590,1275 3845,1280 780,1290 885,1290 1895,1310 1990,1310 2060,1310 2145,1310 3645,1310 2815,1320 3230,1320 3310,1320 55,1345 2855,1370 2745,1395 2065,1400 2145,1400 1895,1405 1985,1405 3645,1405 3065,1410 3205,1410 3305,1410 540,1420 912,1442 1029,1442 1900,1485 1990,1490 2065,1490 2150,1490 3845,1490 610,1495 3610,1520 515,1525 3200,1525 3330,1525 3510,1525 75,1530 1090,1532 2890,1535 3095,1535 905,1560 2715,1575 1000,1585 1900,1585 1990,1585 2070,1585 2950,1585 800,1590 595,1610 2770,1610 1065,1615 3845,1620 3205,1635 3435,1635 3615,1645 3015,1655 3295,1655 1070,1665 905,1670 2825,1670 835,1685 1285,1695 1365,1695 3505,1700 3595,1710 2875,1720 745,1725 2295,1725 3090,1725 3405,1725 65,1730 2700,1730 530,1735 995,1750 1195,1760 2906.69,1768.31 840,1770 3315,1775 2745,1780 3530,1780 3850,1785 610,1795 930,1800 2690,1810 3175,1815 2800,1825 2965,1825 530,1835 1120,1835 3445,1855 740,1860 2384,1867 2865,1875 2800,1885 1160,1895 3035,1895 3650,1895 3265,1905 610,1920 820,1920 60,1930 2803,1939 510,1940 2925,1955 3100,1955 2018,1956 1245,1960 1125,1970 3575,1970 1495,1975 3345,1975 3850,1985 735,1990 2059,1998 1855,2005 555,2010 2950,2015 3170,2020 3625,2020 1215,2025 1565,2025 1495,2030 2126,2031 1793.47,2043.47 2055,2060 3230,2060 50,2075 1160,2075 1380,2075 2745,2080 3684.82,2079.82 610,2090 1505,2090 3465,2090 3025,2095 1738.47,2098.47 1050,2105 2660,2105 1780,2110 945,2115 1860,2115 840,2125 890,2125 995,2130 2593.03,2131.97 1370,2135 790,2140 1295,2140 2115,2140 2800,2140 1245.77,2140.77 3093,2149 490,2150 560,2150 1750,2155 2510,2155 1450,2160 3490,2165 3734,2176 1779,2180 3840,2180 1860,2195 2650,2195 2860,2195 3385,2195 2045,2200 2445,2200 2560,2200 2760,2205 55,2210 2110,2265 60,2340 2045,2350 3850,2350 2115,2360 2080,2420 1975,2425 3590,2450 55,2455 3750,2550 60,2580 744,2671 2085,2695 585,2700 65,2720 495,2735 1990,2755 880,2770 580,2775 1145,2795 1280,2795 1435,2805 740,2810 1025,2820 470,2835 2040,2840 595,2845 55,2875 775,2915 910,2915 1045,2915 1280,2915 2015,2920 60,2990 1190,2990 765,2995 910,2995 1045,2995 1340,2995 70,3115 1045,3115 1215,3115 1400,3115 935,3120 1540,3145 1240,3165 985,3180 2015,3180 1810,3185 1150,3190 1755,3225 1915,3225 1180,3245 55,3260 2020,3270 1835,3275 180,3290 3840,3350 3755,3355 255,3360 1880,3364 55,3365 3690,3365 3195,3375 3100,3390 855,3400 3595,3410 325,3415 2990,3415 395,3430 320,3485 3160,3505 395,3510 3465,3515 3600,3560 3440,3570 360,3585 425,3600 975,3600 895,3610 770,3615 575,3620 665,3620 3135,3620 320,3660 1115,3670 560,3675 1335,3675 1595,3675 1880,3675 2110,3675 2270,3675 2620,3675 2900,3675 435,3680 745,3680 935,3680 2765,3680 2435,3685 3065,3685 3285,3685 3355,3685 3595,3685 2965,3690 3460,3690
  other v2: 1190,465 1330,475 1508,651 2535,690 1619.65,750.35 1740,885 2535,910 2505,1575 2605,1575 2565,1720 1530,1743 2555,1785 1265,1810 1350,1835 2480,1855 1280,1880 2590,1895 2434,1908 2695,1935 2550,1939 295,2165 1975,2175 370,2215 2275,2215 185,2255 305,2315 2350,2320 2235,2325 1895,2415 2560,2425 2275,2430 2350,2430 2930,2430 3150,2430 3445,2465 450,2500 215,2520 3515,2525 2345,2530 3025,2530 580,2535 1645,2535 2045,2535 2265,2535 870,2540 1085,2540 1245,2540 1420,2540 2515,2540 3140,2540 3255,2550 2650,2555 285,2565 3370,2590 2410,2625 2735,2625 1545,2640 1315,2645 970,2650 1900,2655 1690,2675 3265,2675 340,2735 3430,2735 3290,2745 1605,2755 210,2765 1800,2770 2396,2805 2595,2840 3295,2850 1515,2855 3425,2890 1630,2895 2865,2915 355,2925 230,2955 1535,2975 1800,2980 2380,2985 1435,2990 1970,2995 2865,2995 3810,2995 1630,3005 2185,3005 2285,3005 2620,3005 570,3030 230,3115 445,3120 1810,3120 2390,3135 2160,3140 2470,3140 2750,3150 3795,3155 300,3200 2765,3250 675,3255 3185,3260 3405,3260 370,3265 790,3265 2975,3265 470,3270 745,3275 3725,3275 1075,3295 830,3305 780,3315 2485,3340 2380,3350 2800,3365 990,3450 1170,3460 1345,3470 2030,3470 2220,3470 1520,3475 1775,3475 2640,3475 2750,3485 2425,3500 1715,3570 1470,3575 1910,3590 2065,3590 1195,3595 2235,3595 2860,3595 3015,3600
  other v3: 1759,1077 1723,1079 2642,1215 2744,1246 2608,1256 2704,1287 2561,1302 2672,1320 1425,1453 1472,1463 1447,1523 1494.37,1554.51
KEY: P2.5 S1.1 | length 268.3
  Top Layer w10: P2.5@3405,1175 3569.96,1010.04 S1.1@3569.96,975
LED1: D2.2 P2.1 | length 245.6
  Top Layer w10: D2.2@3165.63,1360 3390,1360 P2.1@3405,1375
LED2: D3.2 P2.3 | length 236.4
  Top Layer w10: D3.2@3170.63,1270 3175.63,1275 P2.3@3405,1275
NC: U2.73
NetC1_1: C1.1 L1.1 U1.2 | length 144.4
  Top Layer w10: L1.1@3017.5,2907.32 L1.1@3022.5,2902.32
  Top Layer w30: U1.2@3017.5,2770 C1.1@3017.5,2830 L1.1@3017.5,2907.32
NetC1_2: C1.2 U1.6 | length 301.7
  Top Layer w10: C1.2@3050.96,2830 3122.5,2830 3142.5,2810 3142.5,2710 3108.01,2675.51 U1.6@3054.9,2675.51
NetC6_2: C6.2 U1.5 | length 55.5
  Top Layer w10: C6.2@3017.5,2620 U1.5@3017.5,2675.51
NetD1_2: D1.2 R31.2 | length 68.7
  Top Layer w30: D1.2@2720,2869.29 D1.2@2720.63,2868.66 ; D1.2@2720.63,2865 D1.2@2720.63,2868.66 ; R31.2@2720.63,2932.83 D1.2@2720.63,2868.66
NetD2_1: D2.1 R1.2 | length 116.4
  Top Layer w10: R1.2@2990.63,1355 3100,1355 D2.1@3105,1360
NetD3_1: D3.1 R2.2 | length 120
  Top Layer w10: R2.2@2990,1270 D3.1@3110,1270
NetP3_A8: P3.A8 R8.1 | length 130.2
  Top Layer w7: P3.A8@615.87,3427.24 615.87,3359.13 635,3340 R8.1@635,3305
NetP3_B8: P3.B8 R7.1 | length 134.2
  Top Layer w7: R7.1@705,3305 705,3330 733.98,3358.98 P3.B8@733.98,3427.24
NetR3_1: R3.1 R5.2 U1.4 | length 856.7
  Top Layer w10: R5.2@2952.5,2585 R5.2@2952.5,2595 ; U1.4@2980.1,2675.51 2980.1,2666.85 2957.5,2644.25 2957.5,2600 2957.5,2595 3265,2595 3360,2690 R3.1@3360,3005
NetR4_2: R4.2 S1.2 | length 89.4
  Top Layer w10: R4.2@3165.63,975 S1.2@3255,975
NetR22_2: R22.2 S3.2 | length 84.4
  Top Layer w10: R22.2@3170.63,755 S3.2@3255,755
NRST: C22.2 S2.2 U2.14 | length 4960.6
  Top Layer w8: v1(1615,1365) 1660.28,1410.28 U2.14@1714.72,1410.28
  Top Layer w10: v1(620,1358) 620,615 1045,190 3115,190 3195,270 C22.2@3195,520 3200,525 S2.2@3260,525
  Bottom Layer w10: v1(620,1358) 1604.21,1358 1611.21,1365 v1(1615,1365)